# EAGLE board CHIP_1_0 (EAGLE 6.6.0)

Size 127 x 101.6 mm. Coordinates in mm from the lower left corner, seen from the top.
Outline: 0,0 127,0 127,101.6 0,101.6 0,0
Copper layers (1*16): Top 0.035mm / dielectric 1.5mm / Bottom 0.035mm
Design rules "default": minimum track width 10mil, minimum drill 24mil, track to track 8mil, track to pad 8mil, pad to pad 8mil, via to via 8mil, smd to smd 8mil, copper to edge 40mil, drill to drill 8mil, minimum pad ring 10mil, minimum via ring 8mil, stop-mask expansion 4mil, vias tented up to drill 0mil, thermal gap 10mil

## Footprints (pad centres in the part's own frame; a part is rotated, then mirrored left to right if it is on the bottom)
C_H_I_P-1_0 = drill 0.9 square: U13-1 0,0; U13-11 -12.7,0; U13-21 -25.4,0; U13-31 -38.1,0; U14-1 0,35.56; U14-11 -12.7,35.56; U14-21 -25.4,35.56; U14-31 -38.1,35.56 | drill 0.9: U13-2 0,2.54; U13-3 -2.54,0; U13-4 -2.54,2.54; U13-5 -5.08,0; U13-6 -5.08,2.54; U13-7 -7.62,0; U13-8 -7.62,2.54; U13-9 -10.16,0; U13-10 -10.16,2.54; U13-12 -12.7,2.54; U13-13 -15.24,0; U13-14 -15.24,2.54; U13-15 -17.78,0; U13-16 -17.78,2.54; U13-17 -20.32,0; U13-18 -20.32,2.54; U13-19 -22.86,0; U13-20 -22.86,2.54; U13-22 -25.4,2.54; U13-23 -27.94,0; U13-24 -27.94,2.54; U13-25 -30.48,0; U13-26 -30.48,2.54; U13-27 -33.02,0; U13-28 -33.02,2.54; U13-29 -35.56,0; U13-30 -35.56,2.54; U13-32 -38.1,2.54; U13-33 -40.64,0; U13-34 -40.64,2.54; U13-35 -43.18,0; U13-36 -43.18,2.54; U13-37 -45.72,0; U13-38 -45.72,2.54; U13-39 -48.26,0; U13-40 -48.26,2.54; U14-2 0,38.1; U14-3 -2.54,35.56; U14-4 -2.54,38.1; U14-5 -5.08,35.56; U14-6 -5.08,38.1; U14-7 -7.62,35.56; U14-8 -7.62,38.1; U14-9 -10.16,35.56; U14-10 -10.16,38.1; U14-12 -12.7,38.1; U14-13 -15.24,35.56; U14-14 -15.24,38.1; U14-15 -17.78,35.56; U14-16 -17.78,38.1; U14-17 -20.32,35.56; U14-18 -20.32,38.1; U14-19 -22.86,35.56; U14-20 -22.86,38.1; U14-22 -25.4,38.1; U14-23 -27.94,35.56; U14-24 -27.94,38.1; U14-25 -30.48,35.56; U14-26 -30.48,38.1; U14-27 -33.02,35.56; U14-28 -33.02,38.1; U14-29 -35.56,35.56; U14-30 -35.56,38.1; U14-32 -38.1,38.1; U14-33 -40.64,35.56; U14-34 -40.64,38.1; U14-35 -43.18,35.56; U14-36 -43.18,38.1; U14-37 -45.72,35.56; U14-38 -45.72,38.1; U14-39 -48.26,35.56; U14-40 -48.26,38.1 | hole 3.08: 6.78,2.56

## Placement (x,y rotation side)
IC1  C_H_I_P-1_0  [C_H_I_P-1_0]  83.82,33.02 0 top

## Library data of the parts
IC1 = SENG

## Nets
BAT: IC1.U13-8
CHG-IN: IC1.U13-2
GND: IC1.U13-1 IC1.U13-4 IC1.U13-12 IC1.U13-39 IC1.U14-1 IC1.U14-21 IC1.U14-22 IC1.U14-39 IC1.U14-40

## Tracks (layer width: path | path; a pad name or v marks a point on that pad's centre or on a via)
GND  (8 unrouted)

## Text on the board
Top: See board layers 102 and 103 for parts installed on C.H.I.P. computing module.
Bottom: See board layers 102 and 103 for parts installed on C.H.I.P. computing module.